# EAGLE board ESP32 (EAGLE 9.6.2)
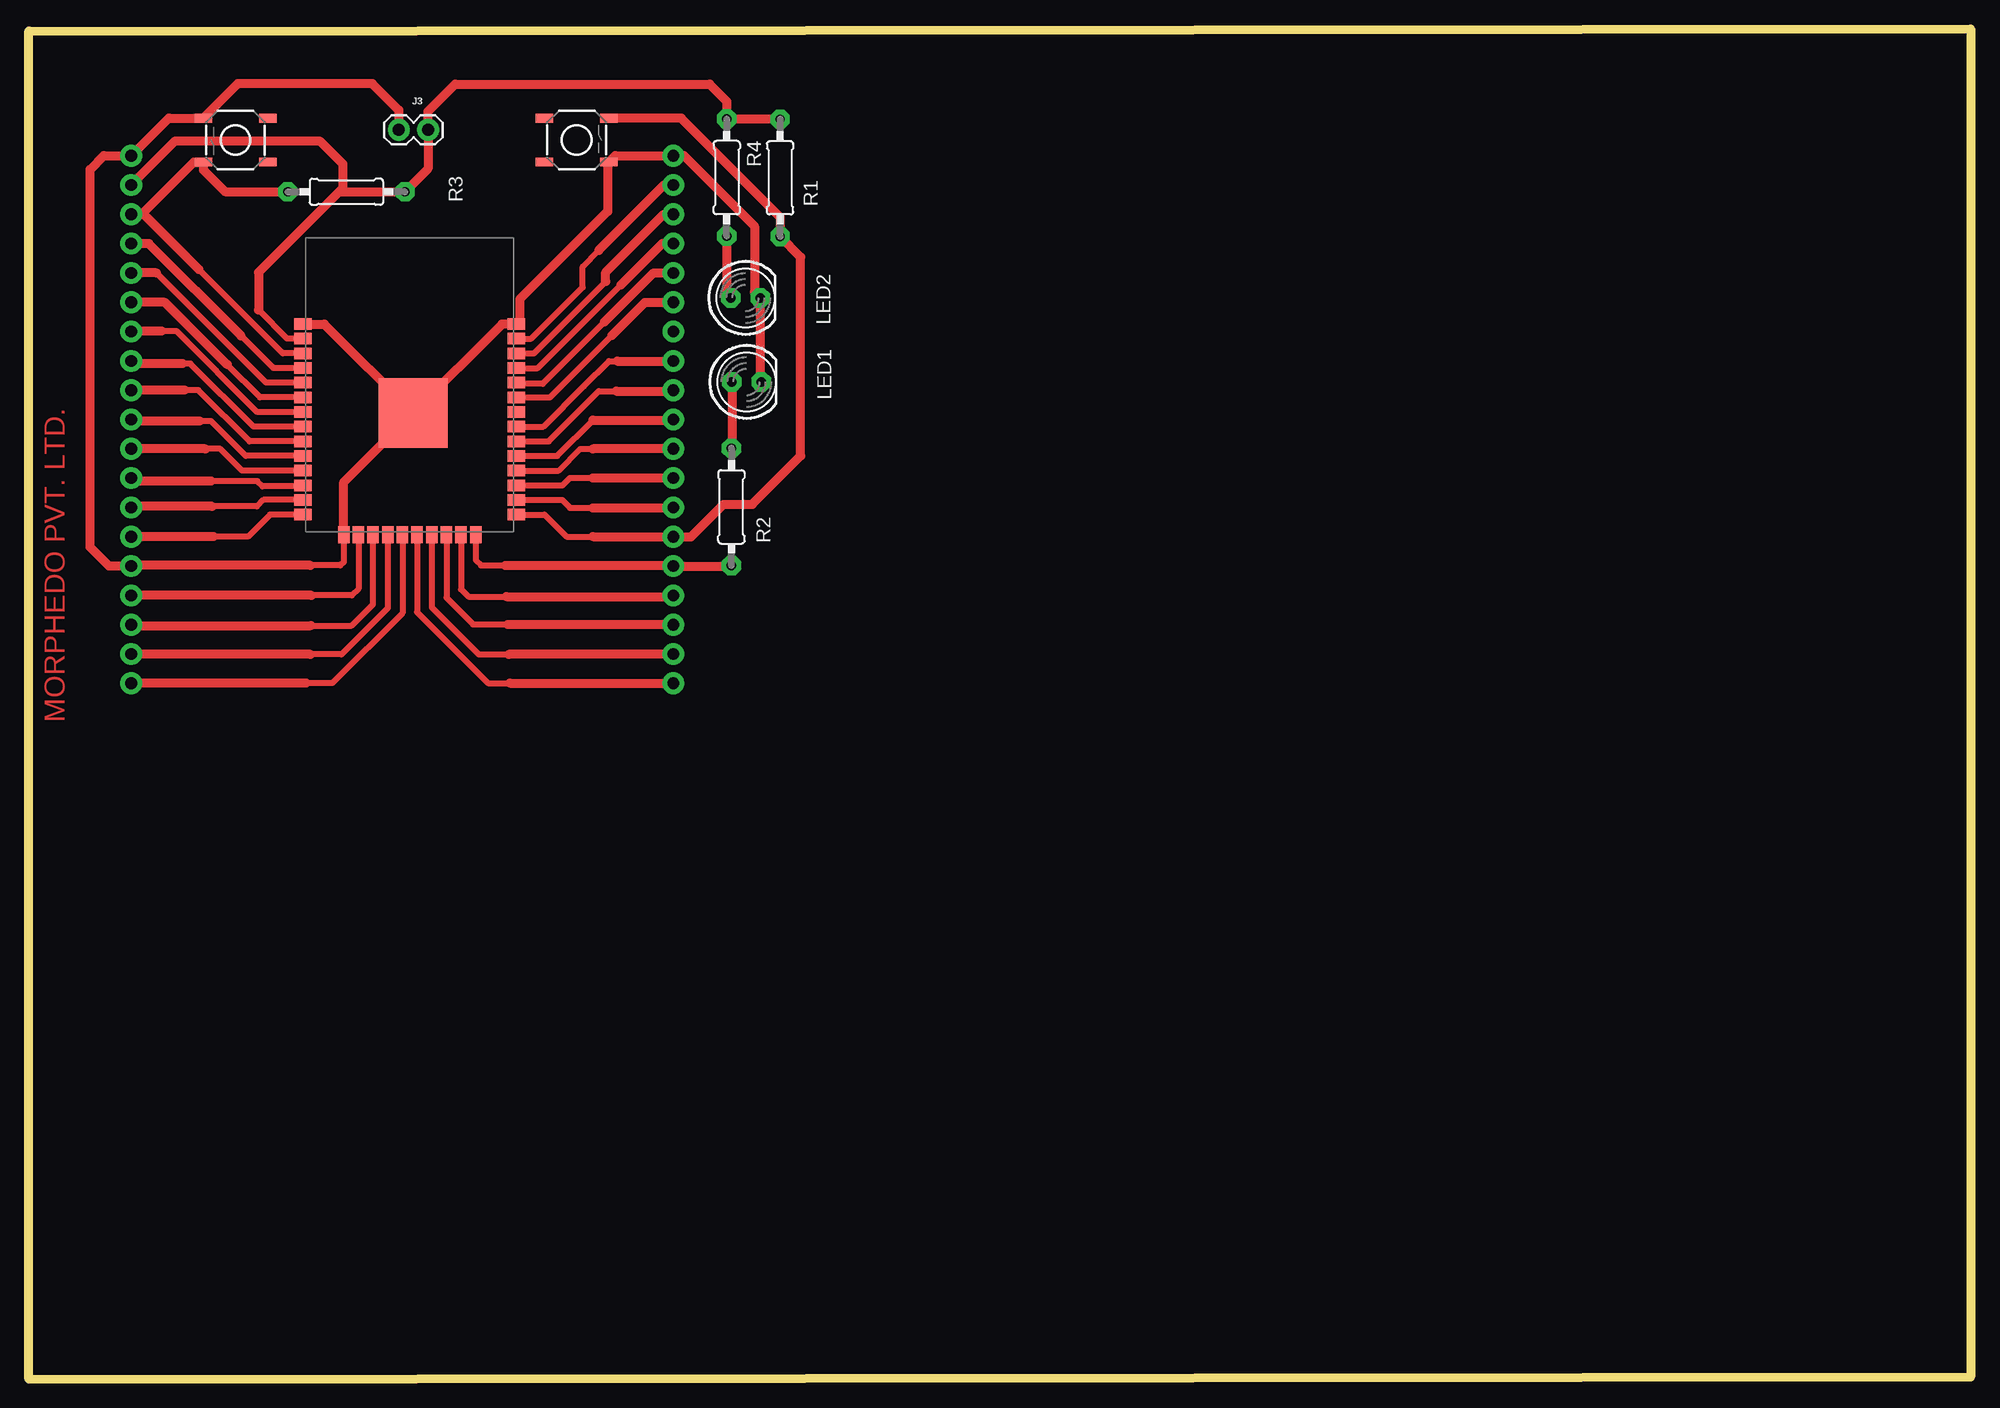
[diagram p0: board, top side]

Size 168.3 x 117 mm. Coordinates in mm from the lower left corner, seen from the top.
Outline: 168.3,117 168.3,0.2 0,0 0,116.8 168.3,117
Copper layers (1*16): Top 0.035mm / dielectric 1.5mm / Bottom 0.035mm
Design rules "default": minimum track width 6mil, minimum drill 0.35mm, track to track 6mil, track to pad 6mil, pad to pad 6mil, via to via 6mil, smd to smd 6mil, copper to edge 40mil, drill to drill 6mil, minimum pad ring 10mil, minimum via ring 8mil, stop-mask expansion 4mil, vias tented up to drill 0mil, thermal gap 10mil

## Footprints (pad centres in the part's own frame; a part is rotated, then mirrored left to right if it is on the bottom)
1X02 = drill 1.016 pad 1.88: 1 0,0; 2 2.54,0
1X19_NO_SILK = drill 1.016 pad 1.88: 1 0,0; 2 2.54,0; 3 5.08,0; 4 7.62,0; 5 10.16,0; 6 12.7,0; 7 15.24,0; 8 17.78,0; 9 20.32,0; 10 22.86,0; 11 25.4,0; 12 27.94,0; 13 30.48,0; 14 33.02,0; 15 35.56,0; 16 38.1,0; 17 40.64,0; 18 43.18,0; 19 45.72,0
LED5MM = drill 0.813 pad 1.676 octagon: A -1.27,0; K 1.27,0
0207/10 = drill 0.813 pad 1.676 octagon: 1 -5.08,0; 2 5.08,0
TACTILE_SWITCH_SMD_5.2MM = smd 1.524 x 0.762: 1 -2.794,1.905; 2 2.794,1.905; 3 -2.794,-1.905; 4 2.794,-1.905
ESP-WROOM-32 = smd 1.5 x 1: 1 -9.25,7; 2 -9.25,5.73; 3 -9.25,4.46; 4 -9.25,3.19; 5 -9.25,1.92; 6 -9.25,0.65; 7 -9.25,-0.62; 8 -9.25,-1.89; 9 -9.25,-3.16; 10 -9.25,-4.43; 11 -9.25,-5.7; 12 -9.25,-6.97; 13 -9.25,-8.24; 14 -9.25,-9.51; 25 9.25,-9.51; 26 9.25,-8.24; 27 9.25,-6.97; 28 9.25,-5.7; 29 9.25,-4.43; 30 9.25,-3.16; 31 9.25,-1.89; 32 9.25,-0.62; 33 9.25,0.65; 34 9.25,1.92; 35 9.25,3.19; 36 9.25,4.46; 37 9.25,5.73; 38 9.25,7 | smd 1 x 1.5: 15 -5.7,-11.25; 16 -4.43,-11.25; 17 -3.16,-11.25; 18 -1.89,-11.25; 19 -0.62,-11.25; 20 0.65,-11.25; 21 1.92,-11.25; 22 3.19,-11.25; 23 4.46,-11.25; 24 5.73,-11.25 | smd 6 x 6: GND 0.3,-0.7

## Placement (x,y rotation side)
J3  [1X02]  32.06,108.25 0 top
J4  [1X19_NO_SILK]  8.87,60.29 90 top
J5  [1X19_NO_SILK]  55.86,106.01 270 top
LED1  [LED5MM]  62.21,86.41 0 top
LED2  [LED5MM]  62.12,93.69 0 top
R1  10K  [0207/10]  65.11,104.09 90 top
R2  1K  [0207/10]  60.89,75.58 270 top
R3  10K  [0207/10]  27.52,102.88 180 top
R4  1K  [0207/10]  60.49,104.11 90 top
S1  [TACTILE_SWITCH_SMD_5.2MM]  47.48,107.36 0 top
S2  [TACTILE_SWITCH_SMD_5.2MM]  17.92,107.36 180 top
U1  ESP-WROOM-32  [ESP-WROOM-32]  33,84.42 0 top

## Library data of the parts
J3-J5 = SparkFun-Connectors
LED1 LED2 R1-R4 = adafruit
S1 S2 = SparkFun-Switches; PROD_ID: SWCH-14139
U1 = ESP32

## Nets
3V3: J3.2 J4.18 R1.2 R3.1 R4.2 U1.2
CLK: J5.19 U1.20
CMD: J4.1 U1.19
EN: J4.17 R3.2 S2.2 U1.3
GND: J3.1 J4.5 J4.19 J5.1 LED1.K LED2.K S1.4 S2.4 U1.1 U1.15 U1.38 U1.GND
IO0: J5.14 R1.1 S1.2 U1.25
IO2: J5.15 R2.2 U1.24
IO4: J5.13 U1.26
IO5: J5.10 U1.29
IO12: J4.6 U1.14
IO13: J4.4 U1.16
IO14: J4.7 U1.13
IO15: J5.16 U1.23
IO16: J5.12 U1.27
IO17: J5.11 U1.28
IO18: J5.9 U1.30
IO19: J5.8 U1.31
IO21: J5.6 U1.33
IO22: J5.3 U1.36
IO23: J5.2 U1.37
IO25: J4.10 U1.10
IO26: J4.9 U1.11
IO27: J4.8 U1.12
IO32: J4.12 U1.8
IO33: J4.11 U1.9
IO34: J4.14 U1.6
IO35: J4.13 U1.7
N$1: LED1.A R2.1
N$2: LED2.A R4.1
NC: J5.7
RXD0: J5.5 U1.34
SD0: J5.18 U1.21
SD1: J5.17 U1.22
SD2: J4.3 U1.17
SD3: J4.2 U1.18
SENSOR_VN: J4.15 U1.5
SENSOR_VP: J4.16 U1.4
TXD0: J5.4 U1.35

## Tracks (layer width: path | path; a pad name or v marks a point on that pad's centre or on a via)
3V3
  Top 0.508: U1.2 22.39,90.15 19.9,92.64
  Top 0.762: 9.07,103.47 J4.18 12.7,107.3 25.2,107.3 27.2,105.3 27.2,103.2 26.9,102.9 | R1.2 65.09,109.19 R4.2 60.49,110.71 59,112.2 36.95,112.2 34.6,109.85 J3.2 34.6,104.88 R3.1 32.58,102.9 26.9,102.9 | 19.9,92.64 19.9,95.9 26.9,102.9
CLK
  Top 0.508: U1.20 33.65,66.45 39.8,60.3 41.7,60.3
  Top 0.762: 41.7,60.3 J5.19
CMD
  Top 0.508: U1.19 32.38,66.38 26.3,60.3 24,60.3
  Top 0.762: 24,60.3 J4.1
EN
  Top 0.508: U1.3 22.02,88.88 14.76,96.14
  Top 0.762: 14.76,96.14 9.97,100.93 J4.17 9.77,100.93 14.29,105.45 S2.2 15.13,104.77 17,102.9 22.42,102.9 R3.2
GND
  Top 0.508: U1.15 27.3,70.8 27,70.5 24.4,70.5
  Top 0.762: 24.4,70.5 8.92,70.5 J4.5 6.95,70.45 5.3,72.1 5.3,104.8 6.51,106.01 J4.19 12.12,109.27 S2.4 18.11,112.25 29.76,112.25 32.06,109.95 J3.1 | U1.1 25.6,91.42 U1.GND | U1.GND 41,91.42 U1.38 42.55,91.72 42.55,93.55 50.17,101.17 50.17,105.36 S1.4 50.83,106.01 J5.1 56.79,106.01 62.89,99.91 62.89,94.19 LED2.K 63.39,86.5 LED1.K | U1.15 27.3,77.72 U1.GND
IO0
  Top 0.508: U1.25 44.69,74.91 46.6,73 48.9,73
  Top 0.762: 48.9,73 J5.14 57.39,72.99 60.2,75.8 62.7,75.8 66.9,80 66.9,97.22 R1.1 65.11,100.69 56.53,109.27 S1.2
IO2
  Top 0.508: U1.24 38.73,70.97 39.2,70.5 41.3,70.5
  Top 0.762: 41.3,70.5 55.81,70.5 J5.15 60.84,70.45 R2.2
IO4
  Top 0.508: U1.26 46.22,76.18 46.9,75.5 48.9,75.5
  Top 0.762: 48.9,75.5 55.83,75.5 J5.13
IO5
  Top 0.508: U1.29 45.79,79.99 48.9,83.1
  Top 0.762: J5.10 55.81,83.1 48.9,83.1
IO12
  Top 0.508: U1.14 20.9,74.9 19,73 16,73
  Top 0.762: 16,73 J4.6
IO13
  Top 0.508: U1.16 28.57,68.47 28,67.9 24.5,67.9
  Top 0.762: 24.5,67.9 J4.4
IO14
  Top 0.508: U1.13 20.32,76.18 19.77,75.63 15.87,75.63
  Top 0.762: 15.87,75.63 8.97,75.63 J4.7
IO15
  Top 0.508: U1.23 37.46,68.44 38.1,67.8 41.4,67.8
  Top 0.762: 41.4,67.8 55.75,67.8 J5.16
IO16
  Top 0.508: U1.27 46.25,77.45 46.9,78.1 48.9,78.1
  Top 0.762: 48.9,78.1 55.83,78.1 J5.12
IO17
  Top 0.508: U1.28 45.92,78.72 47.8,80.6 48.9,80.6
  Top 0.762: J5.11 48.9,80.6
IO18
  Top 0.508: U1.30 45.06,81.26 49.4,85.6 50.9,85.6
  Top 0.762: J5.9 55.77,85.6 50.9,85.6
IO19
  Top 0.508: U1.31 44.6,82.53 48.1,86.03 50.27,88.2 51,88.2
  Top 0.762: 51,88.2 55.83,88.2 J5.8
IO21
  Top 0.508: U1.33 45.17,85.07 50.55,90.45
  Top 0.762: J5.6 53.41,93.31 50.55,90.45
IO22
  Top 0.508: U1.36 43.78,88.88 50,95.1
  Top 0.762: 50,95.1 50,95.9 55.03,100.93 J5.3
IO23
  Top 0.508: 42.46,90.07 42.33,90.07 U1.37 43.55,90.15 48,94.6 48,96.4 49.4,97.8
  Top 0.762: 49.4,97.8 55.07,103.47 J5.2
IO25
  Top 0.508: U1.10 18.81,79.99 15.8,83 14.8,83
  Top 0.762: 14.8,83 9.02,83 J4.10
IO26
  Top 0.508: U1.11 18.48,78.72 16.59,80.61 15.29,80.61
  Top 0.762: 15.29,80.61 J4.9
IO27
  Top 0.508: U1.12 23.65,77.35 20.25,77.35 19.8,77.8 15.8,77.8
  Top 0.762: 15.8,77.8 9.14,77.8 J4.8
IO32
  Top 0.508: U1.8 19.47,82.53 14,88 13.3,88
  Top 0.762: 13.3,88 9.1,88 J4.12
IO33
  Top 0.508: U1.9 19.14,81.26 14.7,85.7 13.5,85.7
  Top 0.762: 13.5,85.7 J4.11
IO34
  Top 0.508: U1.6 20.03,85.07 17.2,87.9
  Top 0.762: 17.2,87.9 11.79,93.31 J4.14
IO35
  Top 0.508: U1.7 19.8,83.8 12.8,90.8 11.5,90.8
  Top 0.762: 11.5,90.8 8.9,90.8 J4.13
N$1
  Top 0.762: LED1.A 60.94,80.71 R2.1
N$2
  Top 0.762: R4.1 60.49,94.05 LED2.A
RXD0
  Top 0.508: U1.34 42.35,86.24 44.54,86.24 49.9,91.6
  Top 0.762: J5.5 54.15,95.85 49.9,91.6
SD0
  Top 0.508: U1.21 34.92,66.88 39,62.8 41.6,62.8
  Top 0.762: 41.6,62.8 55.83,62.8 J5.18
SD1
  Top 0.508: U1.22 36.19,67.71 38.5,65.4 41.5,65.4
  Top 0.762: 41.5,65.4 55.83,65.4 J5.17
SD2
  Top 0.508: 24.44,65.3 28,65.3 29.84,67.14 U1.17
  Top 0.762: 24.44,65.3 8.94,65.3 J4.3
SD3
  Top 0.508: U1.18 31.11,66.81 27.1,62.8 24.4,62.8
  Top 0.762: 24.4,62.8 8.9,62.8 J4.2
SENSOR_VN
  Top 0.508: U1.5 20.56,86.34 11.05,95.85
  Top 0.762: 11.05,95.85 J4.15
SENSOR_VP
  Top 0.508: U1.4 21.2,87.6 18.4,90.4
  Top 0.762: 18.4,90.4 10.41,98.39 J4.16
TXD0
  Top 0.508: U1.35 44.11,87.61 51.3,94.8
  Top 0.762: J5.4 54.89,98.39 51.3,94.8

## Text on the board
Top: MORPHEDO PVT. LTD.